# Altium PCB Send_Medicine_Motor.PcbDoc (part 1 of 5)
Units mm, origin at the board's own origin, x right, y up, seen from the top; angles counter-clockwise.
Board outline 150.04 x 100.2 mm, 2 copper layers (Top Layer, Bottom Layer); 273 components, 158 nets, 892 pads, 508 vias.
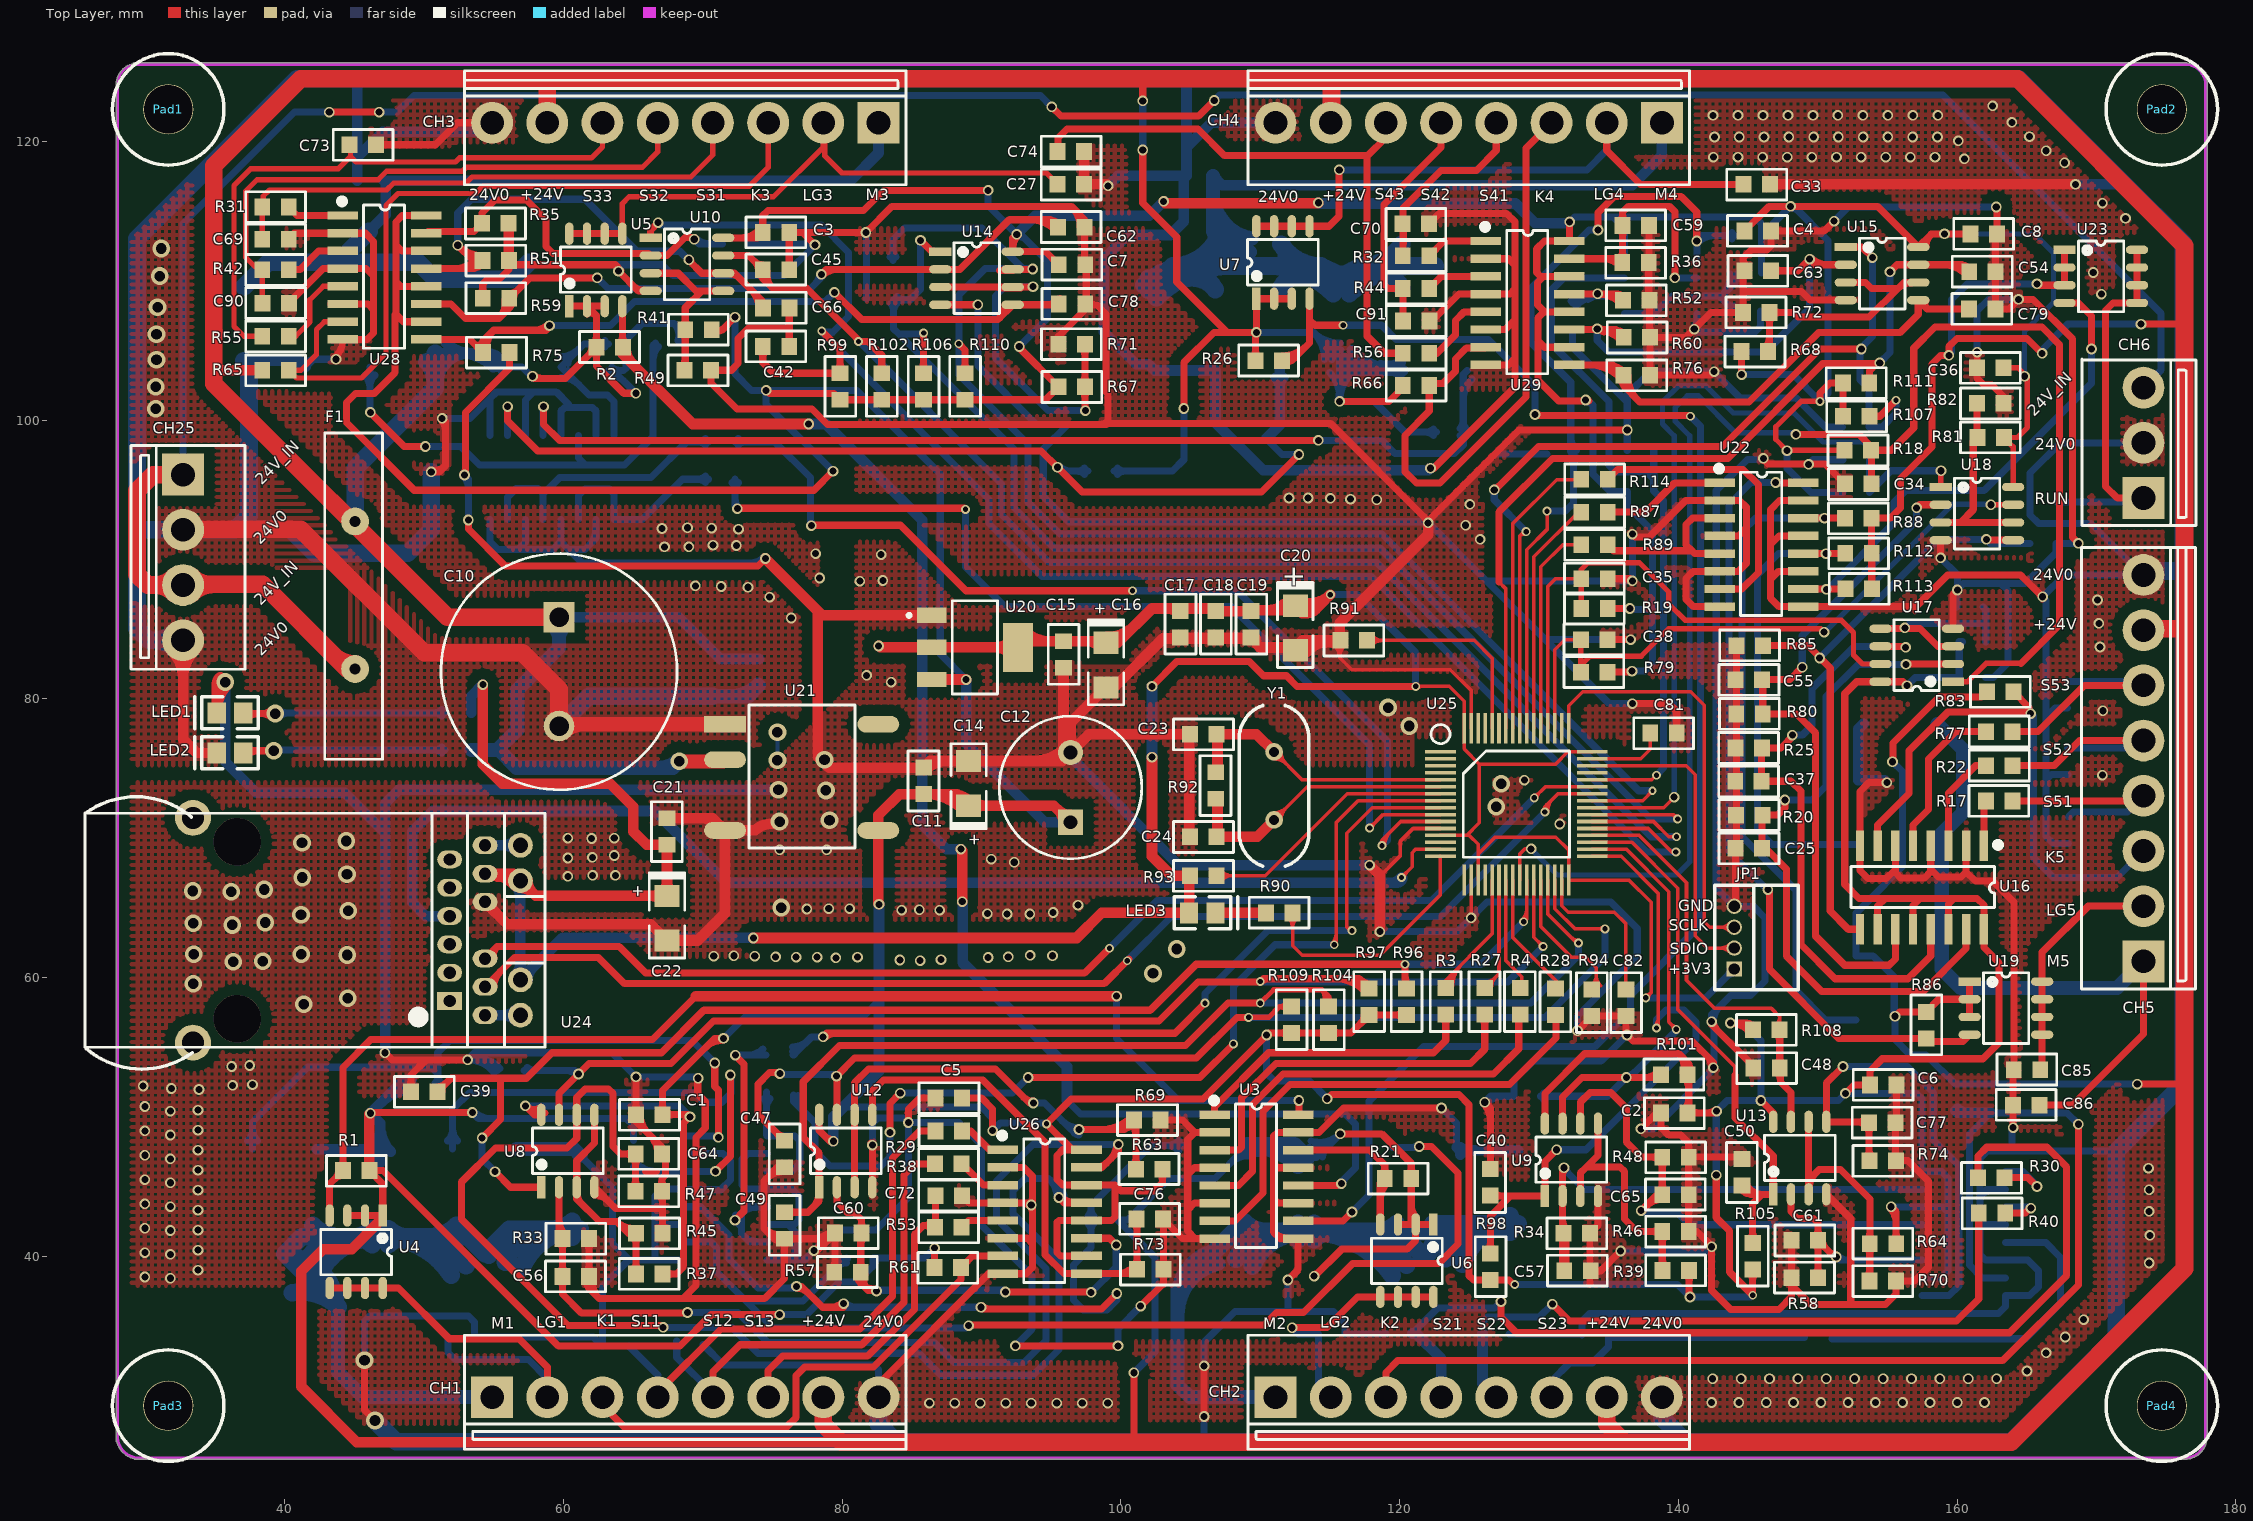
[diagram p0: Top Layer view]
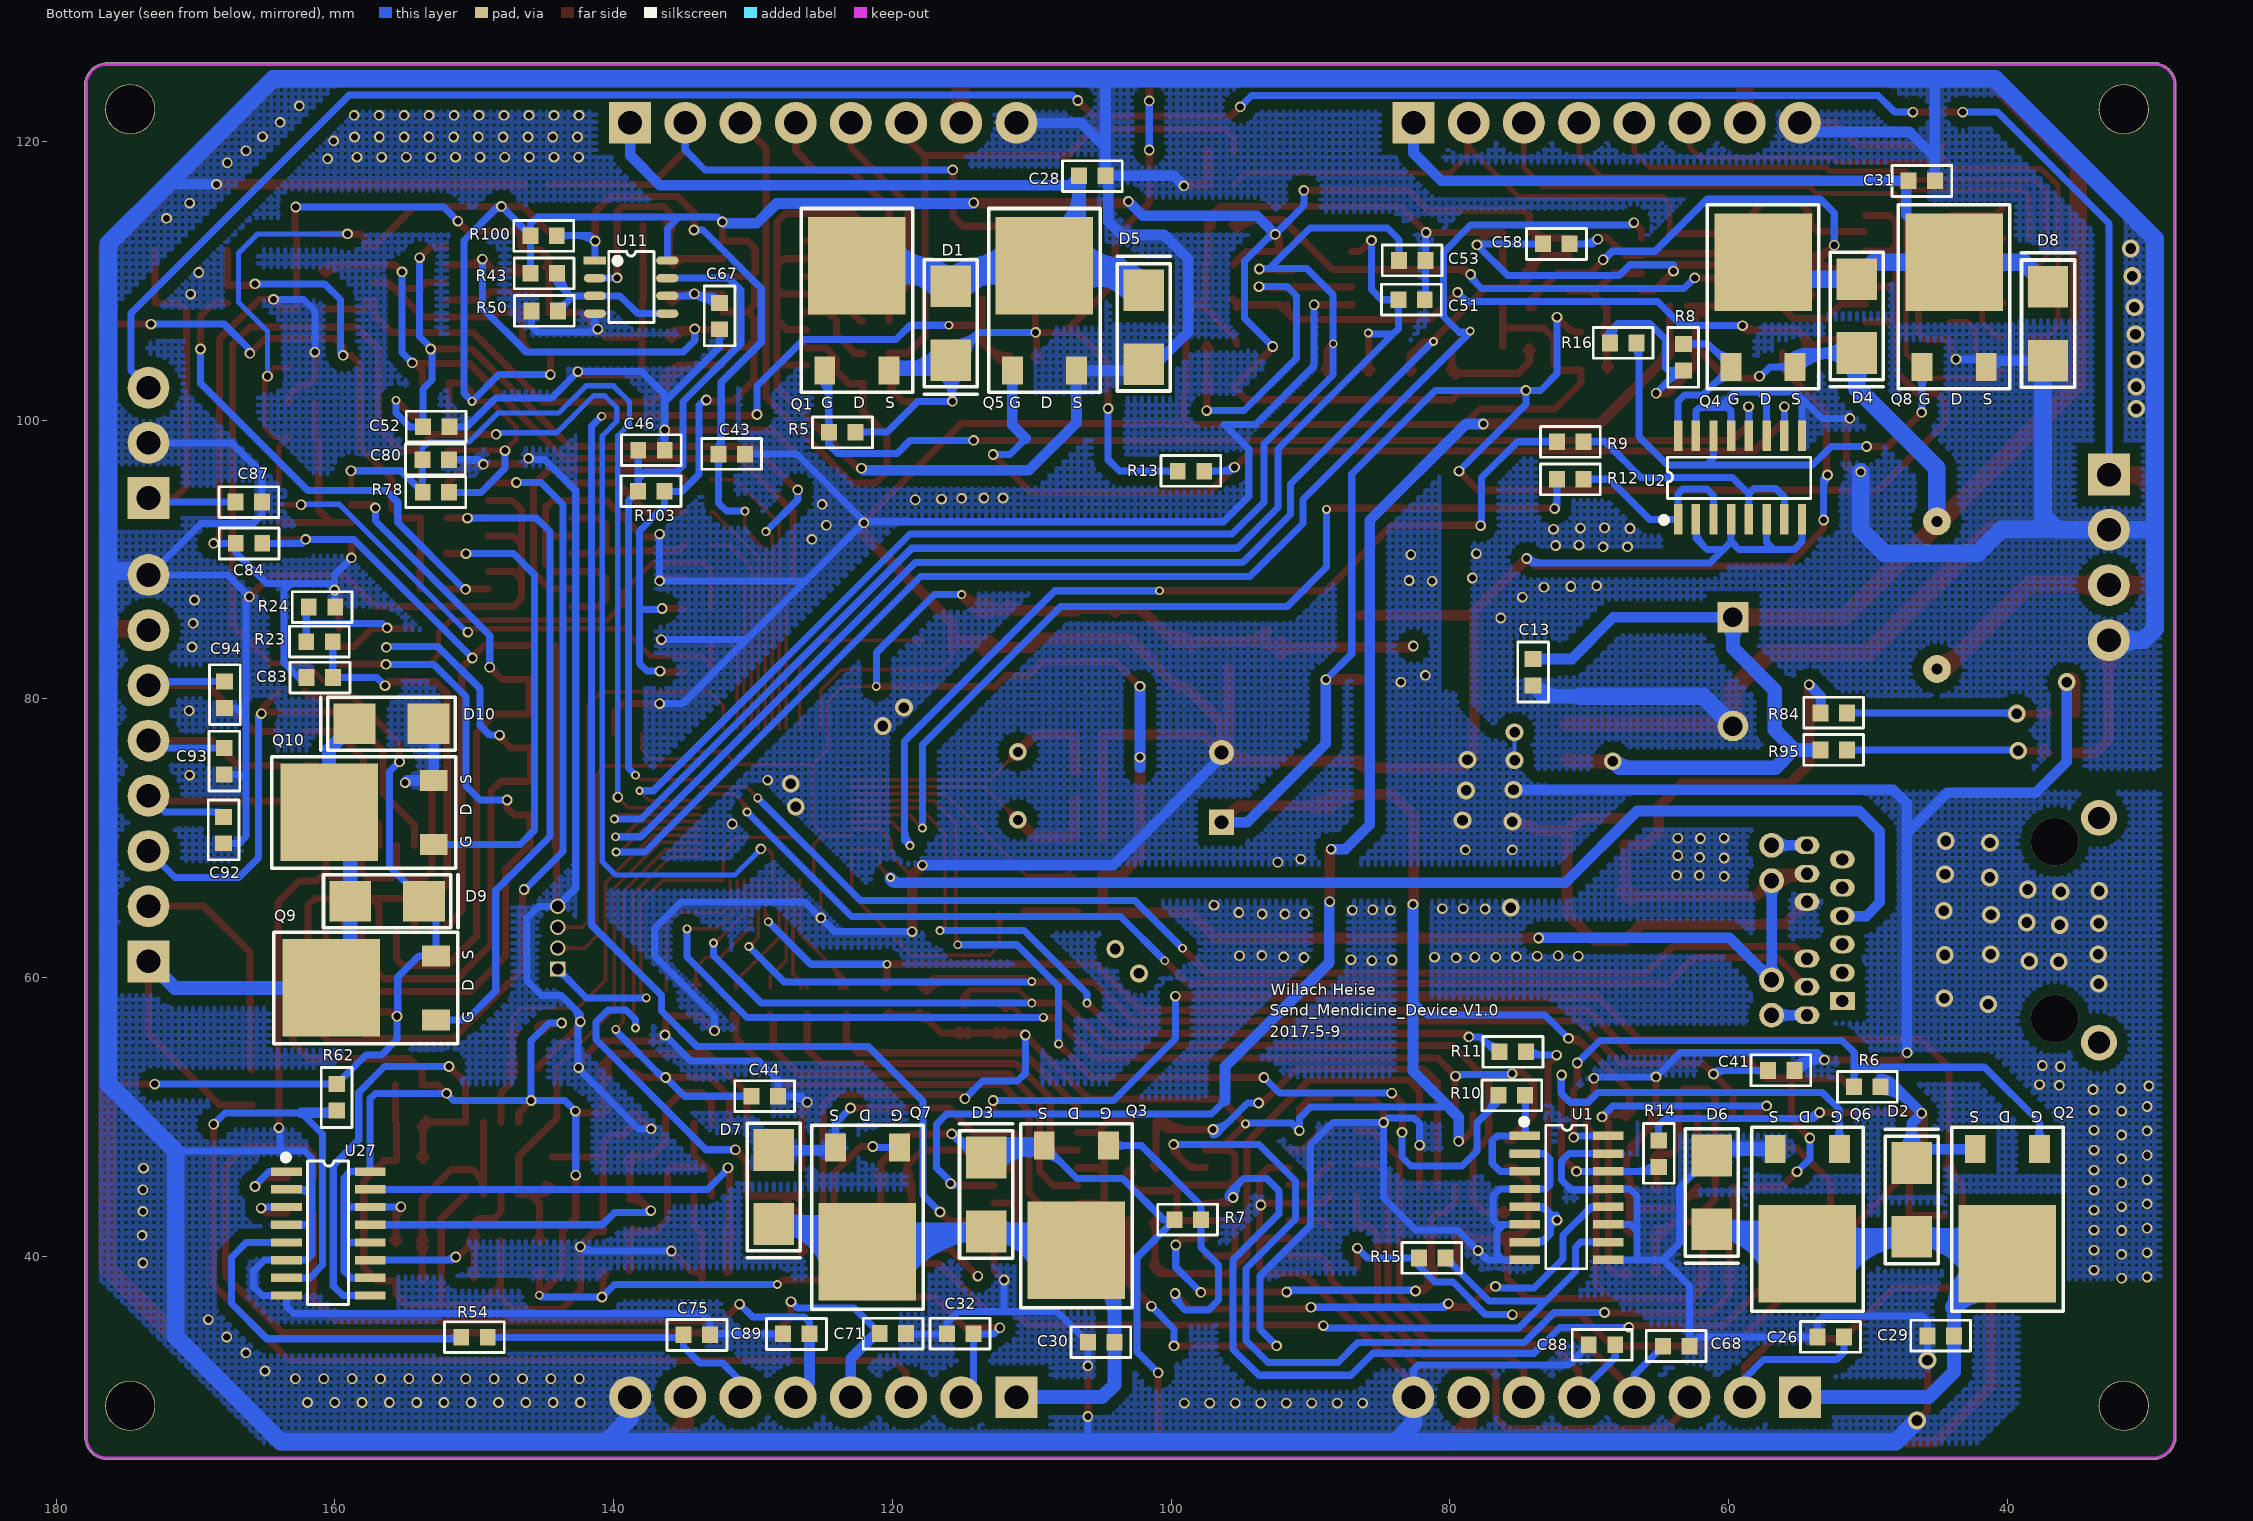
[diagram p1: Bottom Layer view, seen from below]

## Layer stack, top to bottom
Top Solder: solder mask 0.0102, Solder Resist, Dk 3.5
Top Layer: signal copper 0.0356
Dielectric 1: dielectric 0.32, FR-4, Dk 4.8
Bottom Layer: signal copper 0.0356
Bottom Solder: solder mask 0.0102, Solder Resist, Dk 3.5

## Board outline
27.91,26.787 27.91,124.106 cw(c28.002,124.145) 27.902,124.153 cw(c29.5,124.029) 27.91,124.226 27.91,124.247 cw(c28.01,124.247) 27.919,124.288 cw(c29.5,124.029) 29.131,125.588 cw(c29.21,125.527) 29.21,125.627 29.381,125.627 cw(c29.5,124.029) 29.62,125.627 176.456,125.627 cw(c176.456,125.527) 176.464,125.627 cw(c176.34,124.029) 177.91,124.352 cw(c177.838,124.282) 177.938,124.282 177.938,124.149 cw(c176.34,124.029) 177.943,124.029 cw(c176.34,124.029) 177.938,123.909 177.938,26.921 cw(c177.838,26.921) 177.938,26.913 cw(c176.34,27.037) 176.22,25.438 29.286,25.438 cw(c29.286,25.539) 29.204,25.481 cw(c29.529,27.05) 27.966,26.697 cw(c28.01,26.787)

## Design rules (kind name [scope] priority, off if disabled: settings)
Clearance Clearance_1 [InPolygon] p1: gap=0.762
Clearance [All] p2: gap=0.152
ComponentClearance [All] p1: gap=0 collisioncheckmode=3 verticalgap=0 showdistances=FALSE
PolygonConnect [All] p1: connectstyle=Direct reliefconductorwidth=0.762 reliefentries=4 polygonreliefangle="90 Angle" airgapwidth=0.762
RoutingVias [All] p1: holewidth=0.508 width=0.762 viastyle="Through Hole" minholewidth=0.3 minwidth=0.6 maxholewidth=0.711 maxwidth=1.27
SolderMaskExpansion [All] p1: expansion=0.102
Width [All] p1: maxlimit=2.54 minlimit=0.254 preferedwidth=0.254
28 further rules are at their usual default settings.

## Components (designator, comment, footprint, x,y, rotation, side; value= is the part's Value field where it differs from the comment)
C1 "0.1uF" 0805 66.167,50.165 r0 top
C2 "0.1uF" 0805 139.7,50.292 r0 top
C3 "0.1uF" 0805 75.26,113.462 r180 top
C4 "0.1uF" 0805 145.694,113.563 r180 top
C5 "0.1uF" 0805 87.655,51.359 r0 top
C6 "0.1uF" 0805 154.711,52.299 r180 top
C7 "0.1uF" 0805 96.495,111.15 r180 top
C8 "0.1uF" 0805 161.925,113.36 r180 top
C10 "2200uF" C7.8*17 59.69,85.852 r270 top
C11 "0.1uF" 0805 85.852,74.117 r270 top
C12 "470uF" C5*10 96.393,71.145 r90 top
C13 "0.1uF" 0805 74.041,81.915 r90 bottom
C14 "10uF/16V(106C)" "CAP A-3216" 89.078,73.939 r90 top
C15 "0.1uF" 0805 95.885,83.185 r90 top
C16 "10uF/16V(106C)" "CAP A-3216" 98.933,82.423 r270 top
C17 "0.1uF" 0805 104.267,85.344 r90 top
C18 "0.1uF" 0805 106.807,85.344 r90 top
C19 "0.1uF" 0805 109.347,85.344 r90 top
C20 "10uF/16V(106C)" "CAP A-3216" 112.522,85.09 r270 top
C21 "0.1uF" 0805 67.437,70.485 r270 top
C22 "10uF/16V(106C)" "CAP A-3216" 67.437,64.262 r270 top
C23 "20pF" 0805 105.918,77.47 r0 top
C24 "20pF" 0805 105.918,70.104 r0 top
C25 "0.1uF" 0805 145.059,69.291 r0 top
C26 "0.1uF" 0805 52.68,34.214 r0 bottom
C27 "0.1uF" 0805 96.418,116.916 r0 top
C28 "0.1uF" 0805 105.664,117.526 r180 bottom
C29 "0.1uF" 0805 44.78,34.29 r0 bottom
C30 "0.1uF" 0805 105.029,33.833 r0 bottom
C31 "0.1uF" 0805 46.152,117.17 r180 bottom
C32 "0.1uF" 0805 115.138,34.442 r0 bottom
C33 "0.1uF" 0805 145.618,116.916 r0 top
C34 "0.1uF" 0805 152.908,95.428 r0 top
C35 "0.1uF" 0805 133.985,88.621 r180 top
C36 "0.1uF" 0805 162.382,103.759 r0 top
C37 "0.1uF" 0805 145.034,74.092 r0 top
C38 "0.1uF" 0805 133.96,84.252 r180 top
C39 "0.1uF" 0805 50.013,51.816 r0 top
C40 "0.1uF" 0805 126.517,45.314 r270 top
C41 "0.1uF" 0805 56.236,53.34 r0 bottom
C42 "0.1uF" 0805 75.26,105.283 r180 top
C43 "0.1uF" 0805 131.521,97.561 r0 bottom
C44 "0.1uF" 0805 129.159,51.486 r0 bottom
C45 "0.1uF" 0805 75.26,110.795 r180 top
C46 "0.1uF" 0805 137.287,97.841 r0 bottom
C47 "0.1uF" 0805 75.87,47.346 r90 top
C48 "0.1uF" 0805 146.329,53.518 r0 top
C49 "0.1uF" 0805 75.87,42.215 r90 top
C50 "0.1uF" 0805 144.577,46.025 r270 top
C51 "0.1uF" 0805 82.753,108.636 r0 bottom
C52 "0.1uF" 0805 152.73,99.517 r0 bottom
C53 "0.1uF" 0805 82.702,111.455 r0 bottom
C54 "0.1uF" 0805 161.823,110.642 r180 top
C55 "0.1uF" 0805 145.059,81.382 r0 top
C56 "0.1uF" 0805 60.884,38.557 r180 top
C57 "0.1uF" 0805 132.766,38.964 r180 top
C58 "0.1uF" 0805 72.365,112.649 r180 bottom
C59 "0.1uF" 0805 136.957,113.97 r180 top
C60 "0.1uF" 0805 80.442,41.681 r0 top
C61 "0.1uF" 0805 149.073,41.148 r0 top
C62 "0.1uF" 0805 96.444,113.843 r180 top
C63 "0.1uF" 0805 145.694,110.719 r0 top
C64 "0.1uF" 0805 66.142,47.346 r180 top
C65 "0.1uF" 0805 139.802,44.425 r180 top
C66 "0.1uF" 0805 75.286,108.052 r180 top
C67 "0.1uF" 0805 132.41,107.467 r90 bottom
C68 "0.1uF" 0805 63.754,33.553 r0 bottom
C69 "0.1uF" 0805 39.345,112.979 r0 top
C70 "0.1uF" 0805 121.158,114.097 r0 top
C71 "0.1uF" 0805 119.964,34.468 r180 bottom
C72 "0.1uF" 0805 87.655,44.348 r180 top
C73 "0.1uF" 0805 45.618,119.761 r0 top
C74 "0.1uF" 0805 96.418,119.278 r0 top
C75 "0.1uF" 0805 134.036,34.366 r180 bottom
C76 "0.1uF" 0805 102.083,42.672 r180 top
C77 "0.1uF" 0805 154.635,49.581 r180 top
C78 "0.1uF" 0805 96.495,108.331 r180 top
C79 "0.1uF" 0805 161.798,107.975 r180 top
C80 "0.1uF" 0805 152.781,97.155 r0 bottom
C81 "10uF" 0805 138.938,77.546 r0 top
C82 "10uF" 0805 136.246,58.191 r90 top
C83 "0.1uF" 0805 161.087,81.534 r180 bottom
C84 "0.1uF" 0805 166.167,91.161 r180 bottom
C85 "0.1uF" 0805 165.024,53.391 r180 top
C86 "0.1uF" 0805 164.973,50.851 r180 top
C87 "0.1uF" 0805 166.192,94.132 r180 bottom
C88 "0.1uF" 0805 69.088,33.655 r180 bottom
C89 "0.1uF" 0805 126.898,34.442 r180 bottom
C90 "0.1uF" 0805 39.37,108.382 r180 top
C91 "0.1uF" 0805 121.209,107.112 r180 top
C92 "0.1uF" 0805 167.996,70.587 r90 bottom
C93 "0.1uF" 0805 167.945,75.514 r90 bottom
C94 "0.1uF" 0805 167.919,80.289 r90 bottom
CH1 "HEADER1X8" CH3.96-8PIN 54.889,29.896 r0 top locked
CH2 "HEADER1X8" CH3.96-8PIN 111.1,29.896 r0 top locked
CH3 "HEADER1X8" CH3.96-8PIN 82.615,121.336 r180 top locked
CH4 "HEADER1X8" CH3.96-8PIN 138.825,121.336 r180 top locked
CH5 "HEADER1X8" CH3.96-8PIN 173.38,61.163 r90 top
CH6 "HEADER1X3" CH3.96-3PIN 173.38,94.412 r90 top
CH25 "HEADER1X4" CH3.96-4PIN 32.715,96.088 r270 top
D1 "1N5822(SS34)" SMA 115.824,109.601 r270 bottom
D2 "1N5822(SS34)" SMA 46.863,41.402 r90 bottom
D3 "1N5822(SS34)" SMA 113.284,41.783 r90 bottom
D4 "1N5822(SS34)" SMA 50.8,110.109 r270 bottom
D5 "1N5822(SS34)" SMA 101.981,104.013 r90 bottom
D6 "1N5822(SS34)" SMA 61.214,47.244 r270 bottom
D7 "1N5822(SS34)" SMA 128.524,47.625 r270 bottom
D8 "1N5822(SS34)" SMA 37.084,104.267 r90 bottom
D9 "1N5822(SS34)" SMA 158.902,65.481 r180 bottom
D10 "1N5822(SS34)" SMA 153.289,78.207 r0 bottom
F1 "X30_UF900" X30UF900 45.06,82.144 r90 top
JP1 "4 HEADER" CON4_1.5 144.018,62.865 r90 top
LED1 "redled" LED-0805 37.033,78.994 r180 top
LED2 "redled" LED-0805 37.033,76.124 r180 top
LED3 "redled" LED-0805 104.902,64.643 r0 top
Pad1 "Pad" pad35 31.62,122.301 r0 top locked
Pad2 "Pad" pad35 174.672,122.301 r0 top locked
Pad3 "Pad" pad35 31.62,29.285 r0 top locked
Pad4 "Pad" pad35 174.672,29.285 r0 top locked
Q1 "FR5305 (PMOS-2)" TO-252 122.555,107.315 r180 bottom
Q2 "FR5305 (PMOS-2)" TO-252 40.005,43.942 r0 bottom
Q3 "FR5305 (PMOS-2)" TO-252 106.807,44.196 r0 bottom
Q4 "FR5305 (PMOS-2)" TO-252 57.531,107.569 r180 bottom
Q5 "FR4105 (NMOS-2)" TO-252 109.093,107.315 r180 bottom
Q6 "FR4105 (NMOS-2)" TO-252 54.356,43.942 r0 bottom
Q7 "FR4105 (NMOS-2)" TO-252 121.793,44.069 r0 bottom
Q8 "FR4105 (NMOS-2)" TO-252 43.815,107.569 r180 bottom
Q9 "FR5305 (PMOS-2)" TO-252 156.515,59.258 r90 bottom
Q10 "FR4105 (NMOS-2)" TO-252 156.667,71.857 r90 bottom
R1 "2.2K" 0805 45.136,46.152 r0 top
R2 "2.2K" 0805 63.322,105.232 r180 top
R3 "1K" 0805 123.317,58.293 r270 top
R4 "1K" 0805 128.651,58.293 r270 top
R5 "2.2K" 0805 123.596,99.136 r180 bottom
R6 "2.2K" 0805 50.063,52.172 r180 bottom
R7 "2.2K" 0805 98.806,42.621 r0 bottom
R8 "2.2K" 0805 63.246,104.521 r270 bottom
R9 "200R" 0805 71.374,98.45 r180 bottom
R10 "200R" 0805 75.565,51.562 r180 bottom
R11 "200R" 0805 75.489,54.686 r180 bottom
R12 "200R" 0805 71.374,95.758 r180 bottom
R13 "2.2K" 0805 98.577,96.342 r0 bottom
R14 "2.2K" 0805 65.024,47.371 r90 bottom
R15 "2.2K" 0805 81.28,39.878 r0 bottom
R16 "2.2K" 0805 67.564,105.537 r0 bottom
R17 "2.2K" 0805 163.017,72.669 r180 top
R18 "10K" 0805 152.883,97.841 r0 top
R19 "10K" 0805 133.985,86.487 r180 top
R20 "10K" 0805 145.085,71.653 r180 top
R21 "2.2K" 0805 119.888,45.593 r0 top
R22 "2.2K" 0805 163.043,75.209 r180 top
R23 "10K" 0805 161.112,84.099 r0 bottom
R24 "10K" 0805 160.934,86.589 r180 bottom
R25 "10K" 0805 145.059,76.479 r180 top
R26 "2.2K" 0805 110.617,104.267 r180 top
R27 "1K" 0805 126.111,58.293 r270 top
R28 "1K" 0805 131.191,58.268 r270 top
R29 "2.2K" 0805 87.655,48.997 r0 top
R30 "2.2K" 0805 162.458,45.644 r0 top
R31 "2.2K" 0805 39.345,115.291 r0 top
R32 "2.2K" 0805 121.183,111.785 r0 top
R33 "10K" 0805 60.884,41.275 r0 top
R34 "10K" 0805 132.715,41.656 r0 top
R35 "10K" 0805 55.118,114.122 r0 top
R36 "10K" 0805 136.931,111.303 r0 top
R37 "10K" 0805 66.167,38.735 r180 top
R38 "2.2K" 0805 87.63,46.634 r0 top
R39 "10K" 0805 139.827,38.989 r180 top
R40 "2.2K" 0805 162.509,43.104 r0 top
R41 "10K" 0805 69.698,106.477 r180 top
R42 "2.2K" 0805 39.345,110.795 r0 top
R43 "10K" 0805 145.009,110.541 r180 bottom
R44 "2.2K" 0805 121.183,109.449 r0 top
R45 "10K" 0805 66.167,41.656 r0 top
R46 "10K" 0805 139.802,41.783 r0 top
R47 "10K" 0805 66.116,44.679 r0 top
R48 "10K" 0805 139.802,47.117 r0 top
R49 "10K" 0805 69.647,103.581 r0 top
R50 "10K" 0805 144.958,107.823 r0 bottom
R51 "10K" 0805 55.143,111.455 r0 top
R52 "10K" 0805 136.982,108.61 r0 top
R53 "2.2K" 0805 87.63,42.088 r0 top
R54 "2.2K" 0805 149.987,34.188 r0 bottom
R55 "2.2K" 0805 39.345,106.02 r0 top
R56 "2.2K" 0805 121.183,104.8 r0 top
R57 "10K" 0805 80.391,38.862 r180 top
R58 "10K" 0805 149.073,38.456 r180 top
R59 "10K" 0805 55.169,108.737 r180 top
R60 "10K" 0805 137.033,105.943 r0 top
R61 "2.2K" 0805 87.579,39.192 r0 top
R62 "2.2K" 0805 159.868,51.41 r270 bottom
R63 "10K" 0805 102.032,46.253 r180 top
R64 "10K" 0805 154.686,40.894 r180 top
R65 "2.2K" 0805 39.345,103.581 r0 top
R66 "2.2K" 0805 121.183,102.489 r0 top
R67 "10K" 0805 96.469,102.387 r0 top
R68 "10K" 0805 145.491,104.927 r0 top
R69 "10K" 0805 101.905,49.784 r0 top
R70 "10K" 0805 154.661,38.227 r0 top
R71 "10K" 0805 96.469,105.435 r180 top
R72 "10K" 0805 145.593,107.721 r180 top
R73 "10K" 0805 102.108,39.065 r0 top
R74 "10K" 0805 154.661,46.863 r0 top
R75 "10K" 0805 55.194,104.851 r0 top
R76 "10K" 0805 137.008,103.226 r0 top
R77 "2.2K" 0805 163.043,77.648 r180 top
R78 "10K" 0805 152.756,94.818 r0 bottom
R79 "10K" 0805 133.96,81.915 r180 top
R80 "10K" 0805 145.11,78.918 r180 top
R81 "10K" 0805 162.408,98.755 r180 top
R82 "10K" 0805 162.382,101.219 r0 top
R83 "2.2K" 0805 163.093,80.518 r0 top
R84 "1K" 0805 52.451,78.994 r0 bottom
R85 "10K" 0805 145.136,83.82 r180 top
R86 "2.2K" 0805 157.785,56.591 r90 top
R87 "1K" 0805 133.985,93.396 r0 top
R88 "2.2K" 0805 152.908,92.964 r0 top
R89 "200R" 0805 133.985,91.059 r0 top
R90 "1K" 0805 111.379,64.643 r180 top
R91 "10K" 0805 116.713,84.201 r0 top
R92 "1M" 0805 106.807,73.787 r270 top
R93 "10K" 0805 105.918,67.31 r0 top
R94 "10K" 0805 133.782,58.191 r90 top
R95 "10K" 0805 52.451,76.327 r0 bottom
R96 "10K" 0805 120.498,58.268 r90 top
R97 "10K" 0805 117.805,58.268 r90 top
R98 "10K" 0805 126.517,39.243 r90 top
R99 "10K" 0805 79.858,102.413 r90 top
R100 "10K" 0805 145.034,113.233 r180 bottom
R101 "10K" 0805 139.7,53.035 r180 top
R102 "10K" 0805 82.846,102.413 r90 top
R103 "10K" 0805 137.312,94.894 r0 bottom
R104 "10K" 0805 114.91,56.972 r90 top
R105 "10K" 0805 145.339,40.005 r90 top
R106 "10K" 0805 85.835,102.413 r90 top
R107 "10K" 0805 152.781,100.279 r0 top
R108 "10K" 0805 146.304,56.261 r0 top
R109 "10K" 0805 112.243,56.972 r90 top
R110 "10K" 0805 88.824,102.413 r90 top
R111 "10K" 0805 152.756,102.667 r0 top
R112 "2.2K" 0805 152.933,90.449 r0 top
R113 "2.2K" 0805 152.959,87.909 r0 top
R114 "1K" 0805 133.985,95.758 r0 top
U1 "TLP280-4" SO16 71.628,44.196 r180 bottom
U2 "TLP280-4" SO16 59.182,95.885 r90 bottom
U3 "TLP280-4" SO16 109.728,45.72 r0 top
U4 "CEM4435A" SOP8-OP27 47.041,42.926 r270 top
U5 "CEM4435A" SOP8-OP27 60.427,108.179 r90 top
U6 "CEM4435A" SOP8-OP27 122.428,42.291 r270 top
U7 "CEM4435A" SOP8-OP27 109.728,108.712 r90 top
U8 "LM293" SOP8-OP27 58.42,44.958 r90 top
U9 "LM293" SOP8-OP27 130.429,44.323 r90 top
U10 "LM293" SOP8-OP27 66.269,113.081 r0 top
U11 "LM293" SOP8-OP27 141.351,111.455 r180 bottom
U12 "LM293" SOP8-OP27 78.359,44.958 r90 top
U13 "LM293" SOP8-OP27 146.812,44.45 r90 top
U14 "LM293" SOP8-OP27 87.046,112.09 r0 top
U15 "LM293" SOP8-OP27 152.019,112.42 r0 top
U16 "TLP280-4" SO16 157.48,66.472 r270 top
U17 "LM293" SOP8-OP27 159.715,81.229 r180 top
U18 "LM293" SOP8-OP27 158.826,95.199 r0 top
U19 "CEM4435A" SOP8-OP27 160.909,59.715 r0 top
U20 "AMS1117-3.3" SOT223 89.535,83.693 r270 top
U21 "B2405XT-2WR2" B2405XT-2WR2 71.603,78.181 r0 top
U22 "TLP280-4" SO16 145.974,91.059 r0 top
U23 "CEM4435A" SOP8-OP27 167.716,112.217 r0 top
U24 "USR-K3" USR-K3 51.841,58.318 r180 top
U25 "STM32F103RCT6" LQFP64 122.936,76.2 r0 top
U26 "TLP280-4" SO16 94.539,43.205 r0 top
U27 "TLP280-4" SO16 160.477,41.631 r180 bottom
U28 "TLP280-4" SO16 47.168,110.236 r0 top
U29 "TLP280-4" SO16 129.184,108.407 r0 top
Y1 "8MHz" XTAL_US 110.998,76.2 r270 top

## Footprints (in the part's own frame and the unit in brackets; to place one, negate y for a bottom-side part, rotate by r counter-clockwise, add the part's x,y. Pads: shape width x height; smd on the part's side, far side on the other; paste and mask are expansions set on the pad)
0805 [mm] "1.14mm,1.2mm,3.05mm"
  rect 1.14x1.2 smd: 1(-0.95,0) 2(0.95,0)
  silkscreen extent -2.13,-1.12 2.16,1.09
B2405XT-2WR2 [mm]
  rect 3x1.2 smd: 1(0,0)
  oval 3x1.2 smd: 2(0,-2.54) 4(0,-7.62) 5(11,-7.62) 8(11,0)
  silkscreen extent 1.73,-8.89 9.32,1.37
C5*10 [mm]
  rect 1.8x1.8 hole 1: 1(0,0)
  round 1.8 hole 1: 2(5,0)
  silkscreen extent -2.61,-5.12 7.61,5.12
C7.8*17 [mm]
  rect 2.2x2.2 hole 1.4: 1(0,0)
  round 2.2 hole 1.4: 2(7.8,0)
  silkscreen extent -4.57,-8.47 12.37,8.47
"CAP A-3216" [mm]
  rect 1.6x1.8 smd: 1(-1.6,0) 2(1.6,0)
  silkscreen extent -3.25,-1.27 2.85,1.27
CH3.96-3PIN [mm]
  rect 3x3 hole 1.7: 1(0,0)
  round 3 hole 1.7: 2(3.96,0) 3(7.92,0)
  silkscreen extent -1.98,-3.76 9.98,4.42
CH3.96-4PIN [mm]
  rect 3x3 hole 1.7: 1(0,0)
  round 3 hole 1.7: 2(3.96,0) 3(7.92,0) 4(11.887,0)
  silkscreen extent -2.08,-3.73 13.97,4.45
CH3.96-8PIN [mm]
  rect 3x3 hole 1.7: 1(0,0)
  round 3 hole 1.7: 2(3.96,0) 3(7.92,0) 4(11.887,0) 5(15.847,0) 6(19.807,0) 7(23.767,0) 8(27.727,0)
  silkscreen extent -1.98,-3.73 29.71,4.44
CON4_1.5 [mm]
  rect 1.1x1.1 hole 0.8: 1(-2.25,0)
  round 1.1 hole 0.8: 2(-0.75,0) 3(0.75,0) 4(2.25,0)
  silkscreen extent -3.75,-4.6 3.75,1.4
LED-0805 [mm]
  rect 1.3x1.5 smd: 1(0,0) 2(1.9,0)
  silkscreen extent -1.08,-1.14 3.49,1.14
LQFP64 [mm] "LQFP64"
  rect 2.2x0.254 smd: 1(0,0) 2(0,-0.5) 3(0,-1) 4(0,-1.5) 5(0,-2) 6(0,-2.5) 7(0,-3) 8(0,-3.5) 9(0,-4) 10(0,-4.5) 11(0,-5) 12(0,-5.5) 13(0,-6) 14(0,-6.5) 15(0,-7) 16(0,-7.5) 33(10.9,-7.5) 34(10.9,-7) 35(10.9,-6.5) 36(10.9,-6) 37(10.9,-5.5) 38(10.9,-5) 39(10.9,-4.5) 40(10.9,-4) 41(10.9,-3.5) 42(10.9,-3) 43(10.9,-2.5) 44(10.9,-2) 45(10.9,-1.5) 46(10.9,-1) 47(10.9,-0.5) 48(10.9,0)
  rect 0.254x2.2 smd: 17(1.7,-9.2) 18(2.2,-9.2) 19(2.7,-9.2) 20(3.2,-9.2) 21(3.7,-9.2) 22(4.2,-9.2) 23(4.7,-9.2) 24(5.2,-9.2) 25(5.7,-9.2) 26(6.2,-9.2) 27(6.7,-9.2) 28(7.2,-9.2) 29(7.7,-9.2) 30(8.2,-9.2) 31(8.7,-9.2) 32(9.2,-9.2) 49(9.2,1.7) 50(8.7,1.7) 51(8.2,1.7) 52(7.7,1.7) 53(7.2,1.7) 54(6.7,1.7) 55(6.2,1.7) 56(5.7,1.7) 57(5.2,1.7) 58(4.7,1.7) 59(4.2,1.7) 60(3.7,1.7) 61(3.2,1.7) 62(2.7,1.7) 63(2.2,1.7) 64(1.7,1.7)
  silkscreen extent -0.68,-7.56 9.26,1.95
pad35 [mm]
  round 3.6 hole 3.5: 1(0.025,0)
  silkscreen extent -3.97,-4 4.03,4
SMA [mm]
  rect 3x2.9 smd: 1(0,0) 2(5.3,0)
  silkscreen extent -1.92,-1.91 7.73,1.91
SO16 [mm] "Wide = 6mm"
  rect 2.2x0.6 smd: 1(-3,4.445) 2(-3,3.175) 3(-3,1.905) 4(-3,0.635) 5(-3,-0.635) 6(-3,-1.905) 7(-3,-3.175) 8(-3,-4.445) 9(3,-4.445) 10(3,-3.175) 11(3,-1.905) 12(3,-0.635) 13(3,0.635) 14(3,1.905) 15(3,3.175) 16(3,4.445)
  silkscreen extent -3.23,-5.08 1.45,5.64
SOP8-OP27 [mm]
  rect 1.6x0.6 smd: 1(0,0)
  oval 1.6x0.6 smd: 2(0,-1.27) 3(0,-2.54) 4(0,-3.81) 5(5.2,-3.81) 6(5.2,-2.54) 7(5.2,-1.27) 8(5.2,0)
  silkscreen extent 0.99,-4.44 4.24,0.64
SOT223 [mm] "SOT-223/SC-73; 4 Leads; Body 6.7 x 7.3 mm, inc. leads (LxW max)"
  rect 1.1x2.15 smd: 1(-2.3,-3.1) 2(0,-3.1) 3(2.3,-3.1)
  rect 3.5x2.15 smd: 4(0,3.1)
  silkscreen extent -3.35,-4.85 3.35,1.63
TO-252 [mm]
  rect 1.5x2 smd: 1(-2.3,-3.75) 3(2.3,-3.75)
  rect 7x7 smd: 2(0,3.75)
  silkscreen extent -4,-5.32 4,7.87
USR-K3 [mil]
  rect 70x50 hole 35: 1(0,0)
  oval 70x50 hole 35: 2(0,-80) 3(0,-160) 4(0,-240) 5(0,-320) 6(0,-400) 7(-100,40) 8(-100,-40) 9(-100,-120) 10(-100,-280) 11(-100,-360) 12(-100,-440)
  round 70 hole 43: 13(-200,40) 14(-200,-60) 15(-200,-340) 16(-200,-440)
  round 101.18 hole 61.81: 17(725,117.5) 17(725,-517.5)
  silkscreen extent -270,-577 1030,192
X30UF900 [mm]
  round 2 hole 0.8: 1(0,0) 2(10.592,0)
  silkscreen extent -6.48,-1.96 16.94,2.18
XTAL_US [mil]
  round 50 hole 28: 1(0,0) 2(192.13,0)
  silkscreen extent -131,-98 323,98

## Part data
C1 C2 C3 C4 C5 C6 C7 C8 C11 C13 C15 C17 C18 C19 C21 C23 C24 C25 C26 C27 C28 C29 C30 C31 C32 C33 C34 C35 C36 C37 C38 C39 C40 C41 C42 C43 C44 C45 C46 C47 C48 C49 C50 C51 C52 C53 C54 C55 C56 C57 C58 C59 C60 C61 C62 C63 C64 C65 C66 C67 C68 C69 C70 C71 C72 C73 C74 C75 C76 C77 C78 C79 C80 C81 C82 C83 C84 C85 C86 C87 C88 C89 C90 C91 C92 C93 C94: library part Cap, "Capacitor"
C10 C12: library part C_2200uF
C14 C16 C20 C22: library part "Cap Pol3", "Polarized Capacitor (Surface Mount)"
CH1 CH2 CH3 CH4 CH5: "Header, 8-Pin"
D1 D2 D3 D4 D5 D6 D7 D8 D9 D10: library part "Diode 1N4148", "High Conductance Fast Diode"
F1: library part "Fuse 1", "Fuse"
JP1: "4 Pin Header"
LED1 LED2 LED3: library part LED2, "Typical RED, GREEN, YELLOW, AMBER GaAs LED"
Q1 Q2 Q3 Q4 Q9: library part PMOS-2, "P-Channel Power MOSFET"
Q5 Q6 Q7 Q8 Q10: library part NMOS-2, "N-Channel Power MOSFET"
R1 R2 R3 R4 R5 R6 R7 R8 R9 R10 R11 R12 R13 R14 R15 R16 R17 R18 R19 R20 R21 R22 R23 R24 R25 R26 R27 R28 R29 R30 R31 R32 R33 R34 R35 R36 R37 R38 R39 R40 R41 R42 R43 R44 R45 R46 R47 R48 R49 R50 R51 R52 R53 R54 R55 R56 R57 R58 R59 R60 R61 R62 R63 R64 R65 R66 R67 R68 R69 R70 R71 R72 R73 R74 R75 R76 R77 R78 R79 R80 R81 R82 R83 R84 R85 R86 R87 R88 R89 R90 R91 R92 R93 R94 R95 R96 R97 R98 R99 R100 R101 R102 R103 R104 R105 R106 R107 R108 R109 R110 R111 R112 R113 R114: library part Res2, "Resistor"
U1 U2 U3 U16 U22 U26 U27 U28 U29: library part TLP521-4
U20: library part AMS1117-5
U25: library part STM32F103RDT6
Y1: library part XTAL, "Crystal Oscillator"

## Via types
v1: diameter 0.762, hole 0.508, Top Layer to Bottom Layer, 415 vias
v2: diameter 1.27, hole 0.762, Top Layer to Bottom Layer, 47 vias
v3: diameter 0.635, hole 0.381, Top Layer to Bottom Layer, 43 vias
v4: diameter 3.4, hole 3.4, Top Layer to Bottom Layer, 2 vias
v5: diameter 0.6, hole 0.3, Top Layer to Bottom Layer, 1 vias

## Nets (pads, with @x,y where several pads share a name; then routed paths per layer and width w, separated by ;. In a path a pad name is that pad's centre, name@x,y a point inside that pad or via, vN(x,y) a via of type N, cw(c..) or ccw(c..) an arc to the next point about the centre after c; other vN are vias at no path point)
24V0: C10.2 C13.1 C26.2 C27.2 C28.2 C29.2 C30.2 C31.2 C32.2 C33.2 C68.1 C69.2 C70.2 C71.2 C72.1 C73.2 C74.2 C75.2 C85.2 C86.2 C87.2 C88.1 C89.1 C90.1 C91.1 C92.1 C93.1 C94.1 CH1.8 CH2.8 CH3.8 CH4.8 CH5.8 CH6.2 CH25.2 CH25.4 D5.1 D6.1 D7.1 D8.1 D10.1 LED2.2 Q5.3 Q6.3 Q7.3 Q8.3 Q10.3 U1.9 U1.11 U1.13 U1.15 U2.9 U2.11 U2.13 U2.15 U3.9 U3.11 U3.13 U3.15 U16.2 U16.4 U16.6 U16.8 U21.1 U22.9 U22.11 U22.13 U22.15 U26.2 U26.4 U26.6 U26.8 U27.2 U27.4 U27.6 U27.8 U28.2 U28.4 U28.6 U28.8 U29.2 U29.4 U29.6 U29.8 | length 1150.4
  Top Layer w0.508: C90.1@40.32,108.382 40.32,108.417 42.774,110.871 U28.4@44.168,110.871 45.847,110.871 46.38,110.338 ; C69.2@40.32,113.03 40.701,113.411 U28.2@44.168,113.411 45.796,113.411 46.38,112.827 46.38,110.338 ; v1@43.6,104.46 ccw(c42.324,105.791) U28.8@44.168,105.791 45.923,105.791 46.38,106.248 46.38,107.925 ; U28.6@44.168,108.331 45.974,108.331 46.38,107.925 ; v2(45.73,32.553) 45.73,28.971 v2(46.482,28.219) ; C73.2@46.568,119.761 50.825,119.761 52.4,121.336 CH3.8@54.888,121.336 ; v1(50.521,96.291) 51.105,96.291 51.537,96.723 ; v1@50.544,96.416 ccw(c50.749,97.51) 51.537,96.723 ; v1@51.218,100.037 cw(c50.45,99.268) 51.537,99.268 ; v1(51.308,100.127) 51.537,99.898 51.537,96.723 ; CH1.8@82.616,29.896 82.616,30.851 90.526,38.76 U26.8@91.539,38.76 93.218,38.76 93.65,39.192 93.65,40.945 ; C72.1@88.605,44.348 89.113,43.84 U26.4@91.539,43.84 93.193,43.84 cw(c93.193,43.568) v1@93.452,43.65 ; 90.296,38.531 cw(c90.739,38.089) U26.8@90.739,38.714 ; U26.6@91.539,41.3 93.294,41.3 93.65,40.945 ; U26.2@91.539,46.38 93.04,46.38 93.65,45.771 93.65,40.945 ; 92.899,43.84 cw(c92.899,43.013) 93.484,43.598 cw(c93.083,43.197) 93.65,43.197 ; v1@93.484,43.778 ccw(c93.083,44.179) 93.65,44.179 ; C74.2@97.394,119.253 C74.2@97.419,119.278 ; v1(105.979,28.509) v1(105.979,32.146) ; 110.999,41.706 ccw(c111.928,42.635) U3.9@111.928,41.321 ; v1(111.989,38.303) 112.728,39.043 U3.9@112.728,41.275 111.43,41.275 110.973,41.732 110.973,44.12 ; U3.11@112.728,43.815 111.277,43.815 110.973,44.12 ; U3.13@112.728,46.355 111.227,46.355 110.973,46.609 ; C70.2@122.108,114.097 122.845,114.833 127.686,114.833 128.27,114.249 128.27,111.125 ; C91.1@122.159,107.112 122.326,107.112 124.257,109.042 U29.4@126.184,109.042 127.914,109.042 128.27,109.398 ; v1(122.225,96.545) 122.453,96.545 128.27,102.362 128.27,104.419 ; v1(123.012,50.648) 115.976,50.648 114.224,48.895 U3.15@112.728,48.895 111.252,48.895 110.973,48.616 110.973,46.609 ; U29.8@126.184,103.962 127.813,103.962 128.27,104.419 ; U29.6@126.184,106.502 127.584,106.502 128.27,107.188 ; U29.2@126.184,111.582 127.813,111.582 128.27,111.125 ; U22.11@148.974,89.154 147.193,89.154 146.609,88.57 ; U22.13@148.974,91.694 147.218,91.694 146.609,91.084 ; U22.15@148.974,94.234 147.269,94.234 146.609,93.574 146.609,91.084 ; v1(154.965,73.99) 153.67,73.99 153.035,73.355 U16.8@153.035,69.472 153.035,67.691 153.619,67.107 154.915,67.107 155.575,67.767 ; U16.6@155.575,69.472 155.575,67.767 ; U16.4@158.115,69.472 158.115,67.767 ; U16.2@160.655,69.472 160.655,67.589 ; v1(164.023,49.235) C86.2@164.023,50.851 164.023,53.34 C85.2@164.074,53.391 164.074,65.415 162.56,66.929 161.315,66.929 160.655,67.589 ; v1(166.141,87.325) 164.567,88.9 159.334,88.9 157.048,86.614 U22.9@148.974,86.614 147.218,86.614 146.609,87.224 146.609,88.57 ; CH5.8@173.371,88.9 CH5.8@173.38,88.89 ; 46.38,107.925 46.38,110.338 ; 110.973,44.12 110.973,46.609 ; 128.27,104.419 128.27,107.188 ; 128.27,107.188 128.27,109.398 ; 128.27,109.398 128.27,111.125 ; 146.609,88.57 146.609,91.084 ; 155.575,67.767 155.575,67.539 155.956,67.158 157.658,67.158 158.115,67.615 158.115,67.767 ; 158.115,67.767 158.674,67.208 160.274,67.208 160.655,67.589
  Top Layer w0.762: CH25.4@31.924,83.41 cw(c30.014,81.499) 32.715,81.499 cw(c35.417,81.499) CH25.4@33.506,83.41 ; CH25.4@32.715,84.201 32.715,77.089 33.68,76.124 LED2.2@35.133,76.124 ; C74.2@97.394,119.253 97.368,119.228 C27.2@97.368,116.916 98.984,116.916 v1(99.085,116.815) ; C33.2@146.568,116.916 v1(168.504,116.916)
  Top Layer w1.016: C10.2@59.69,78.052 59.819,78.181 U21.1@71.603,78.181 ; C10.2@60.109,77.633 cw(c61.431,76.311) 61.431,78.181 ; C10.2@60.109,78.471 ccw(c60.807,79.169) 60.807,78.181
  Top Layer w1.27: CH25.2@32.715,92.128 32.766,92.179 41.146,92.179 50.013,83.312 57.074,83.312 59.69,80.696 C10.2@59.69,78.052 ; C10.2@59.361,78.381 ccw(c58.567,79.175) 59.69,79.175 ccw(c60.813,79.175) C10.2@60.019,78.381
  Bottom Layer w0.508: Q8.3@41.507,104.077 cw(c42.209,103.375) Q8.3@42.209,104.369 ; Q8.3@41.515,103.819 42.065,104.369 v1(43.688,104.369) ; v2(45.73,32.553) C29.2@45.73,34.29 45.73,35.342 46.101,35.712 53.188,35.712 53.63,35.27 C26.2@53.63,34.214 62.144,34.214 C68.1@62.804,33.553 62.804,37.861 64.694,39.751 ; v1(51.308,100.127) 53.315,100.127 54.737,101.549 ; U2.9@54.737,98.885 54.737,101.549 ; U2.11@57.277,98.885 57.277,101.448 57.861,102.032 ; U2.13@59.817,98.885 59.817,100.635 60.096,100.914 60.376,100.914 ; D6.1@61.214,47.244 63.525,44.933 63.525,40.919 64.694,39.751 ; U2.15@62.357,98.885 62.357,100.635 62.078,100.914 60.376,100.914 ; U1.9@68.628,39.751 66.751,39.751 ; U1.11@68.628,42.291 67.031,42.291 66.573,41.834 ; U1.15@68.628,47.371 71.45,47.371 71.984,46.838 71.984,45.466 71.298,44.78 68.679,44.78 U1.13@68.628,44.831 67.081,44.831 66.573,44.323 66.573,41.834 ; C88.1@70.038,33.655 71.486,32.207 82.271,32.207 82.616,31.861 CH1.8@82.616,29.896 ; v1(105.979,28.509) 105.979,26.736 106.02,26.695 ; v1(105.979,32.146) C30.2@105.979,33.833 108.189,36.043 111.963,36.043 ; v1(111.989,38.303) 111.989,36.068 111.963,36.043 ; C71.2@119.014,34.468 118.989,34.442 C32.2@116.088,34.442 116.088,35.22 115.265,36.043 111.963,36.043 ; v1(123.012,50.648) 124.093,49.567 Q7.3@124.093,47.819 ; C89.1@127.848,34.442 133.01,34.442 C75.2@133.086,34.366 133.086,35.347 133.629,35.89 162.966,35.89 163.477,36.401 U27.8@163.477,37.186 165.202,37.186 165.837,37.821 165.837,38.964 165.075,39.726 U27.6@163.477,39.726 162.052,39.726 161.646,40.132 161.646,42.037 ; 161.661,44.339 cw(c162.677,43.323) U27.2@162.677,44.76 ; U27.4@163.477,42.266 161.874,42.266 161.646,42.037 ; U27.2@163.477,44.806 162.128,44.806 161.646,44.323 ; v1(164.023,49.235) 163.932,49.144 163.932,47.549 ; v1(166.141,87.325) 167.706,88.89 CH5.8@173.314,88.89 ; v1@166.395,87.071 166.395,78.689 ; C94.1@167.919,79.339 167.046,79.339 166.395,78.689 ; C93.1@167.945,74.564 166.766,74.564 166.395,74.193 ; C92.1@167.996,69.637 166.888,69.637 166.395,70.129 166.395,74.193 ; 171.425,47.549 163.932,47.549 ; CH5.8@173.38,88.89 CH5.8@173.314,88.89 ; CH6.2@173.38,98.372 167.409,98.372 165.242,96.205 C87.2@165.242,94.132 165.242,93.203 165.862,92.583 169.621,92.583 CH5.8@173.314,88.89 ; 54.737,101.549 55.22,102.032 57.861,102.032 ; 57.861,102.032 59.487,102.032 60.376,101.143 60.376,100.914 ; 64.694,39.751 66.751,39.751 ; 66.573,41.834 66.573,39.929 66.751,39.751 ; 161.646,42.037 161.646,44.323 ; 161.646,44.323 161.646,47.015 162.179,47.549 163.932,47.549 ; 166.395,74.193 166.395,78.689
  Bottom Layer w0.762: D8.1@37.084,104.267 41.067,104.267 Q8.3@41.515,103.819 ; 40.146,104.267 cw(c40.146,102.7) Q8.3@41.254,103.808 ; C31.2@45.202,117.17 45.202,118.862 ; 45.263,124.485 45.202,124.424 45.202,118.862 ; CH3.8@54.888,121.336 54.253,120.701 47.041,120.701 45.202,118.862 ; v1(99.085,116.815) 99.797,117.526 C28.2@104.521,117.526 ; 104.724,124.485 104.714,124.475 104.714,119.573 ; CH4.8@111.098,121.336 106.477,121.336 104.714,119.573 ; v1(122.225,96.545) 122.072,96.393 110.211,96.393 106.793,99.811 Q5.3@106.793,103.565 102.429,103.565 D5.1@101.981,104.013 101.117,104.013 98.781,106.35 98.781,111.557 100.508,113.284 103.556,113.284 104.521,114.249 C28.2@104.521,117.526 ; Q7.3@124.093,47.819 124.287,47.625 D7.1@128.524,47.625 ; Q7.3@124.354,47.308 cw(c125.119,46.543) 125.119,47.625 ; Q7.3@124.354,47.83 ccw(c124.849,48.325) 124.849,47.625 ; D10.1@153.289,78.207 152.917,77.835 Q10.3@152.917,74.157 154.799,74.157 v1(154.965,73.99) ; v1(168.504,116.916) 172.009,116.916 ; C28.2@104.521,117.526 C28.2@104.714,117.526 104.714,119.573
  Bottom Layer w1.016: Q6.3@56.656,47.692 60.766,47.692 D6.1@61.214,47.244 ; 70.739,80.188 73.264,80.188 C13.1@74.041,80.965 ; 71.985,80.188 ccw(c71.985,82.991) C13.1@73.967,81.009
  Bottom Layer w1.27: CH25.4@32.104,83.589 ccw(c30.627,82.113) 30.627,84.201 ccw(c30.627,86.289) CH25.4@32.104,84.813 ; CH25.4@32.715,84.201 30.251,84.201 29.413,85.039 29.413,92.126 ; D8.1@37.084,104.267 37.44,103.911 37.44,93.144 36.474,92.179 ; v2(46.482,28.219) 48.006,26.695 83.896,26.695 ; v1(50.521,96.291) 50.521,92.126 48.844,90.449 42.139,90.449 40.409,92.179 36.474,92.179 ; C10.2@59.69,78.052 61.826,80.188 70.739,80.188 ; C10.2@59.69,78.517 ccw(c59.69,79.64) 60.484,78.846 ccw(c61.278,78.052) C10.2@60.155,78.052 ; CH1.8@82.616,29.896 82.616,27.975 83.896,26.695 ; CH2.8@138.827,29.896 138.827,28.407 140.538,26.695 ; CH5.8@173.38,88.89 173.67,89.179 176.251,89.179 ; 29.413,92.126 29.413,113.005 40.894,124.485 45.263,124.485 104.724,124.485 164.44,124.485 172.009,116.916 176.251,112.674 176.251,89.179 ; 29.413,92.126 29.416,92.128 CH25.2@32.715,92.128 36.424,92.128 36.474,92.179 ; 83.896,26.695 106.02,26.695 140.538,26.695 ; 140.538,26.695 163.881,26.695 171.425,34.239 171.425,47.549 176.251,52.375 176.251,89.179
  other v1: 86.258,29.464 88.087,29.464 89.916,29.464 91.745,29.464 93.574,29.464 95.402,29.464 97.231,29.464 99.06,29.464 142.392,29.515 144.351,29.515 146.309,29.515 148.267,29.515 150.226,29.515 152.184,29.515 154.142,29.515 156.101,29.515 158.059,29.515 160.017,29.515 161.976,29.515 142.469,31.217 144.506,31.217 146.544,31.217 148.582,31.217 150.619,31.217 152.657,31.217 154.694,31.217 156.732,31.217 158.77,31.217 160.807,31.217 162.839,31.217 165.024,31.775 166.395,33.071 167.767,34.214 169.088,35.458 173.787,39.522 173.838,41.504 173.787,43.231 93.574,43.688 173.787,44.78 173.736,46.33 170.434,74.524 170.459,79.146 170.256,83.718 170.18,85.42 76.352,85.801 170.078,87.097 74.803,87.3 73.254,88.011 71.323,88.062 69.469,88.113 78.384,88.671 78.105,90.424 67.259,90.907 69.012,90.907 72.415,91.008 70.739,91.034 72.568,92.177 67.081,92.227 70.637,92.253 68.91,92.278 170.358,109.042 169.774,110.592 172.085,114.478 170.434,115.57 167.716,118.466 160.528,118.745 142.519,118.872 144.286,118.872 146.053,118.872 147.82,118.872 149.586,118.872 151.353,118.872 153.12,118.872 154.886,118.872 156.653,118.872 158.42,118.872 166.395,119.329 160.096,120.04 142.596,120.32 144.374,120.32 146.152,120.32 147.93,120.32 149.708,120.32 151.486,120.32 153.264,120.32 155.042,120.32 156.82,120.32 158.598,120.32 165.202,120.345 163.932,121.361 142.494,121.869 144.286,121.869 146.078,121.869 147.87,121.869 149.662,121.869 151.455,121.869 153.247,121.869 155.039,121.869 156.831,121.869 158.623,121.869 162.56,122.555
  other v2: 30.759,100.813 30.759,102.387 30.81,104.343 30.81,106.172 30.886,108.102 31.039,110.338 31.14,112.319
+3.3V: C15.2 C16.1 C17.2 C18.2 C19.2 C20.1 C21.2 C22.1 JP1.1 LED3.1 R84.2 R93.1 U20.2 U20.4 U24.11 U24.14 U24.15 U25.13 U25.19 U25.32 U25.48 U25.64 | length 273.2
  Top Layer w0.254: v3(121.158,80.899) 123.571,80.899 124.636,79.834 U25.64@124.636,77.9 124.636,76.405 125.73,75.311 ; v3@121.293,80.764 cw(c121.618,80.439) 121.618,80.899 cw(c121.618,81.359) v3@121.293,81.034 ; U25.13@122.936,70.2 124.81,70.2 ; U25.19@125.636,67 125.636,68.867 ; U25.48@133.836,76.2 132.08,76.2 131.191,75.311 125.73,75.311 ; v3(137.668,58.547) 138.049,58.928 138.049,65.405 136.454,67 U25.32@132.136,67 132.136,69.159 131.216,70.079 126.848,70.079 125.636,68.867 ; v3@137.668,58.737 ccw(c137.668,59.197) 137.993,58.872 ccw(c138.318,58.547) v3@137.858,58.547 ; 124.81,70.2 125.73,71.12 125.73,75.311 ; 124.81,70.2 124.999,70.2 125.636,69.563 125.636,68.867
  Top Layer w0.508: v1(102.235,80.899) 104.013,82.677 109.22,82.677 110.236,81.661 111.887,81.661 112.649,80.899 v3(121.158,80.899)
  Top Layer w0.762: v1(54.229,81.026) 54.229,75.311 55.626,73.914 63.373,73.914 65.024,72.263 65.024,70.485 65.974,69.535 C21.2@67.437,69.535 C22.1@67.437,65.862 58.014,65.862 U24.15@56.921,66.954 56.413,67.462 U24.11@54.381,67.462 ; U24.11@54.469,67.462 cw(c54.469,64.502) U24.15@56.562,66.595 ; U24.11@54.855,67.589 ccw(c55.514,67.97) 55.317,67.235 ; U24.15@56.921,66.446 cw(c56.921,65.22) 57.789,66.087 cw(c58.656,66.954) U24.15@57.429,66.954 ; C22.1@67.041,65.566 ccw(c66.325,64.85) 66.325,65.862 ccw(c66.325,66.874) C22.1@67.041,66.158 ; C22.1@67.141,66.158 ccw(c66.425,66.874) 67.437,66.874 ccw(c68.449,66.874) C22.1@67.733,66.158 ; v1(73.635,62.84) 96.825,62.84 98.628,64.643 LED3.1@104.902,64.643 104.902,67.31 103.632,67.31 102.235,68.707 v1(102.235,75.819) ; v1(82.626,83.795) 82.728,83.693 U20.2@86.435,83.693 U20.4@92.635,83.693 93.077,84.135 C15.2@95.885,84.135 98.821,84.135 C16.1@98.933,84.023 99.771,84.023 102.235,86.487 106.614,86.487 C18.2@106.807,86.294 109.281,86.294 109.347,86.36 112.392,86.36 112.522,86.49 114.049,86.49 ; U20.4@92.144,83.202 ccw(c90.96,82.018) 90.96,83.693 ccw(c90.96,85.368) U20.4@92.144,84.184 ; U20.4@93.126,83.877 cw(c93.748,83.255) 93.748,84.135 ; U20.4@93.126,84.859 ccw(c94.873,86.606) 94.873,84.135 ; 97.551,84.135 cw(c97.551,82.741) C16.1@98.537,83.727 ; C16.1@99.033,84.442 ccw(c99.033,87.235) 101.008,85.26 ; 103.373,86.487 cw(c103.373,85.593) C17.2@104.005,86.225 ; 110.647,86.36 ccw(c110.647,87.815) C20.1@111.676,86.786 ; C20.1@113.007,86.153 ccw(c113.223,87.265) 114.023,86.464 ; C20.1@113.152,86.901 ccw(c113.552,88.962) v3(115.037,87.478) 114.049,86.49 ; C20.1@113.376,86.201 cw(c114.049,85.561) 114.049,86.49 ; C20.1@113.376,86.779 ccw(c114.049,87.419) 114.049,86.49
  Bottom Layer w0.508: v3(115.037,87.478) 116.992,87.478 121.158,83.312 v3(121.158,80.899) ; v3(137.668,58.547) 141.95,58.547 JP1.1@144.018,60.615 ; JP1.1@143.722,60.615 cw(c143.007,60.615) 143.513,60.11 cw(c144.018,59.604) JP1.1@144.018,60.319
  Bottom Layer w0.762: R84.2@53.401,78.994 53.401,80.198 v1(54.229,81.026) ; U24.14@56.562,60.202 ccw(c55.695,61.069) 56.921,61.069 ccw(c58.148,61.069) U24.14@57.281,60.202 ; U24.15@56.562,66.595 cw(c55.695,65.728) 56.921,65.728 cw(c58.148,65.728) U24.15@57.281,66.595 ; U24.14@56.921,60.35 ccw(c56.921,61.577) 57.789,60.71 ccw(c58.656,59.842) U24.14@57.429,59.842 ; U24.15@56.921,66.954 U24.14@56.921,59.842 59.944,62.865 73.609,62.865 v1(73.635,62.84) ; 102.235,75.057 v1(102.235,75.819) v1(102.235,80.899)